# EAGLE board RedBot Accelerometer Panel v10 (EAGLE 6.4), part 1 of 4
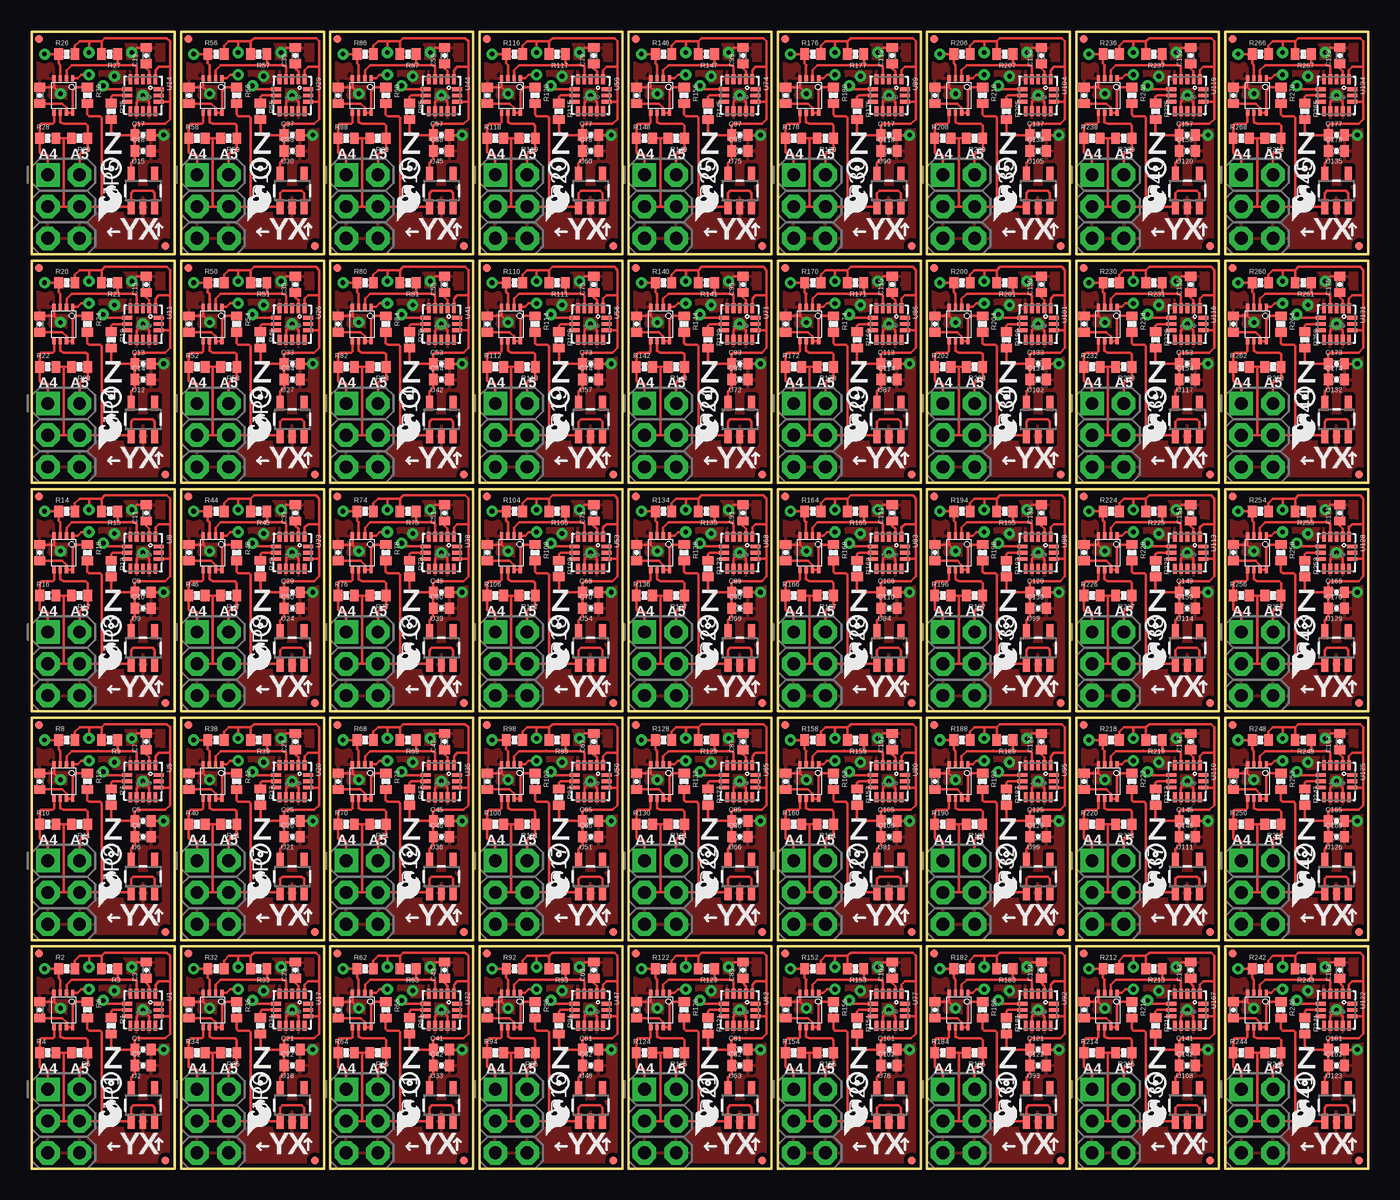
[diagram p0: board, top side]
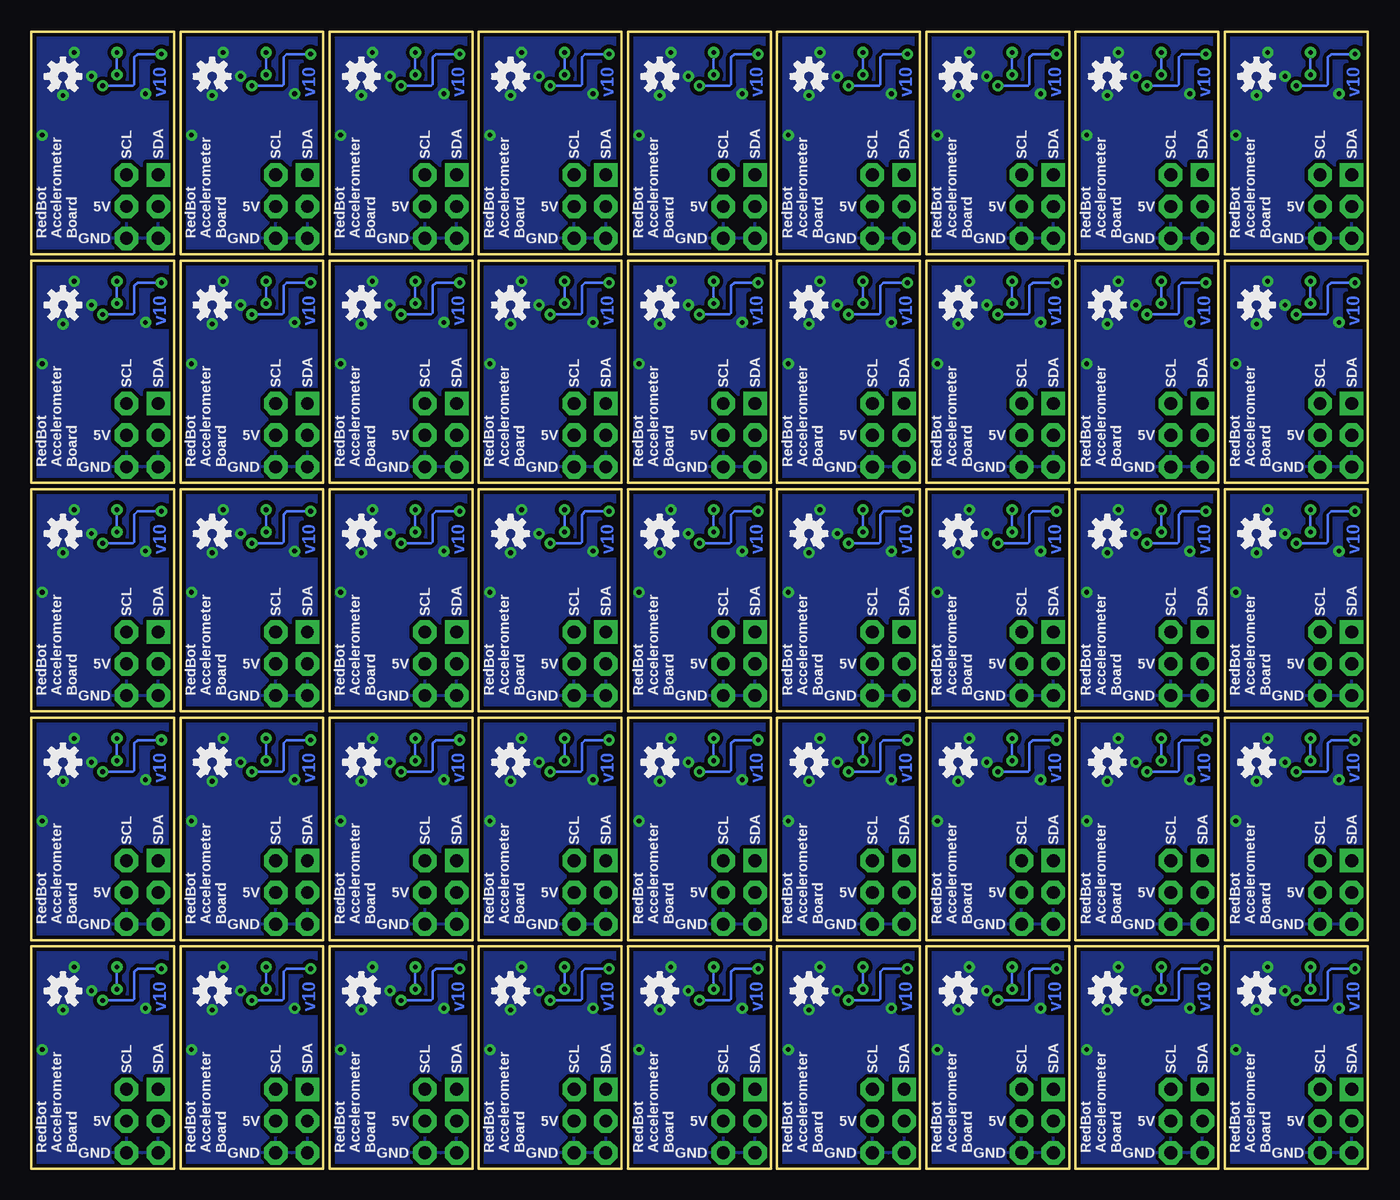
[diagram p1: board, bottom side, seen from below]

Size 106.93 x 90.93 mm. Coordinates in mm from the lower left corner, seen from the top.
Outline: 0,0 0,17.78 11.43,17.78 11.43,0 0,0
Outline: 0,18.29 0,36.07 11.43,36.07 11.43,18.29 0,18.29
Outline: 0,36.58 0,54.36 11.43,54.36 11.43,36.58 0,36.58
Outline: 0,54.86 0,72.64 11.43,72.64 11.43,54.86 0,54.86
Outline: 0,73.15 0,90.93 11.43,90.93 11.43,73.15 0,73.15
Outline: 11.94,0 11.94,17.78 23.37,17.78 23.37,0 11.94,0
Outline: 11.94,18.29 11.94,36.07 23.37,36.07 23.37,18.29 11.94,18.29
Outline: 11.94,36.58 11.94,54.36 23.37,54.36 23.37,36.58 11.94,36.58
Outline: 11.94,54.86 11.94,72.64 23.37,72.64 23.37,54.86 11.94,54.86
Outline: 11.94,73.15 11.94,90.93 23.37,90.93 23.37,73.15 11.94,73.15
Outline: 23.88,0 23.88,17.78 35.31,17.78 35.31,0 23.88,0
Outline: 23.88,18.29 23.88,36.07 35.31,36.07 35.31,18.29 23.88,18.29
Outline: 23.88,36.58 23.88,54.36 35.31,54.36 35.31,36.58 23.88,36.58
Outline: 23.88,54.86 23.88,72.64 35.31,72.64 35.31,54.86 23.88,54.86
Outline: 23.88,73.15 23.88,90.93 35.31,90.93 35.31,73.15 23.88,73.15
Outline: 35.81,0 35.81,17.78 47.24,17.78 47.24,0 35.81,0
Outline: 35.81,18.29 35.81,36.07 47.24,36.07 47.24,18.29 35.81,18.29
Outline: 35.81,36.58 35.81,54.36 47.24,54.36 47.24,36.58 35.81,36.58
Outline: 35.81,54.86 35.81,72.64 47.24,72.64 47.24,54.86 35.81,54.86
Outline: 35.81,73.15 35.81,90.93 47.24,90.93 47.24,73.15 35.81,73.15
Outline: 47.75,0 47.75,17.78 59.18,17.78 59.18,0 47.75,0
Outline: 47.75,18.29 47.75,36.07 59.18,36.07 59.18,18.29 47.75,18.29
Outline: 47.75,36.58 47.75,54.36 59.18,54.36 59.18,36.58 47.75,36.58
Outline: 47.75,54.86 47.75,72.64 59.18,72.64 59.18,54.86 47.75,54.86
Outline: 47.75,73.15 47.75,90.93 59.18,90.93 59.18,73.15 47.75,73.15
Outline: 59.69,0 59.69,17.78 71.12,17.78 71.12,0 59.69,0
Outline: 59.69,18.29 59.69,36.07 71.12,36.07 71.12,18.29 59.69,18.29
Outline: 59.69,36.58 59.69,54.36 71.12,54.36 71.12,36.58 59.69,36.58
Outline: 59.69,54.86 59.69,72.64 71.12,72.64 71.12,54.86 59.69,54.86
Outline: 59.69,73.15 59.69,90.93 71.12,90.93 71.12,73.15 59.69,73.15
Outline: 71.63,0 71.63,17.78 83.06,17.78 83.06,0 71.63,0
Outline: 71.63,18.29 71.63,36.07 83.06,36.07 83.06,18.29 71.63,18.29
Outline: 71.63,36.58 71.63,54.36 83.06,54.36 83.06,36.58 71.63,36.58
Outline: 71.63,54.86 71.63,72.64 83.06,72.64 83.06,54.86 71.63,54.86
Outline: 71.63,73.15 71.63,90.93 83.06,90.93 83.06,73.15 71.63,73.15
Outline: 83.57,0 83.57,17.78 95,17.78 95,0 83.57,0
Outline: 83.57,18.29 83.57,36.07 95,36.07 95,18.29 83.57,18.29
Outline: 83.57,36.58 83.57,54.36 95,54.36 95,36.58 83.57,36.58
Outline: 83.57,54.86 83.57,72.64 95,72.64 95,54.86 83.57,54.86
Outline: 83.57,73.15 83.57,90.93 95,90.93 95,73.15 83.57,73.15
Outline: 95.5,0 95.5,17.78 106.93,17.78 106.93,0 95.5,0
Outline: 95.5,18.29 95.5,36.07 106.93,36.07 106.93,18.29 95.5,18.29
Outline: 95.5,36.58 95.5,54.36 106.93,54.36 106.93,36.58 95.5,36.58
Outline: 95.5,54.86 95.5,72.64 106.93,72.64 106.93,54.86 95.5,54.86
Outline: 95.5,73.15 95.5,90.93 106.93,90.93 106.93,73.15 95.5,73.15
Copper layers (1*16): Top 0.035mm / dielectric 1.5mm / Bottom 0.035mm
Design rules "Sparkfun": minimum track width 8mil, minimum drill 20mil, track to track 8mil, track to pad 8mil, pad to pad 8mil, via to via 8mil, smd to smd 8mil, copper to edge 8mil, drill to drill 8mil, minimum pad ring 12mil, minimum via ring 10mil, stop-mask expansion 4mil, vias tented up to drill 20mil, thermal gap 10mil

## Footprints (pad centres in the part's own frame; a part is rotated, then mirrored left to right if it is on the bottom)
0402-CAP = smd 0.7 x 0.9: 1 -0.65,0; 2 0.65,0
MICRO-FIDUCIAL = smd 0.635 x 0.635: 1 0,0
2X3-NS = drill 1.016 pad 1.88 square: 1 -2.54,-1.27 | drill 1.016 pad 1.88 octagon: 2 -2.54,1.27; 3 0,-1.27; 4 0,1.27; 5 2.54,-1.27; 6 2.54,1.27
0402-RES = smd 0.7 x 0.9: 1 -0.65,0; 2 0.65,0
QFN-16_0.5MM = smd 0.8 x 0.3: 1 -1.275,1; 2 -1.275,0.5; 3 -1.275,0; 4 -1.275,-0.5; 5 -1.275,-1; 9 1.275,-1; 10 1.275,-0.5; 11 1.275,0; 12 1.275,0.5; 13 1.275,1 | smd 0.3 x 0.8: 6 -0.5,-1.275; 7 0,-1.275; 8 0.5,-1.275; 14 0.5,1.275; 15 0,1.275; 16 -0.5,1.275
SOT23-5 = smd 0.55 x 1.2: 1 -0.95,-1.3; 2 0,-1.3; 3 0.95,-1.3; 4 0.95,1.3; 5 -0.95,1.3
PSOP-8 = smd 0.25 x 0.5: 1 -0.73,-1.37; 2 -0.23,-1.37; 3 0.27,-1.37; 4 0.77,-1.37; 5 0.77,1.38; 6 0.27,1.38; 7 -0.23,1.38; 8 -0.73,1.38

## Placement (x,y rotation side)
C1  0.1uF  [0402-CAP]  8.89,9.53 0 top
C2  4.7uF  [0402-CAP]  8.89,8.26 0 top
C3  0.1uF  [0402-CAP]  9.14,15.88 90 top
C4  0.1uF  [0402-CAP]  0.64,12.7 90 top
C5  0.1uF  [0402-CAP]  8.89,27.81 0 top
C6  4.7uF  [0402-CAP]  8.89,26.54 0 top
C7  0.1uF  [0402-CAP]  9.14,34.16 90 top
C8  0.1uF  [0402-CAP]  0.64,30.99 90 top
C9  0.1uF  [0402-CAP]  8.89,46.1 0 top
C10  4.7uF  [0402-CAP]  8.89,44.83 0 top
C11  0.1uF  [0402-CAP]  9.14,52.45 90 top
C12  0.1uF  [0402-CAP]  0.64,49.28 90 top
C13  0.1uF  [0402-CAP]  8.89,64.39 0 top
C14  4.7uF  [0402-CAP]  8.89,63.12 0 top
C15  0.1uF  [0402-CAP]  9.14,70.74 90 top
C16  0.1uF  [0402-CAP]  0.64,67.56 90 top
C17  0.1uF  [0402-CAP]  8.89,82.68 0 top
C18  4.7uF  [0402-CAP]  8.89,81.41 0 top
C19  0.1uF  [0402-CAP]  9.14,89.03 90 top
C20  0.1uF  [0402-CAP]  0.64,85.85 90 top
C21  0.1uF  [0402-CAP]  20.83,9.53 0 top
C22  4.7uF  [0402-CAP]  20.83,8.26 0 top
C23  0.1uF  [0402-CAP]  21.08,15.88 90 top
C24  0.1uF  [0402-CAP]  12.57,12.7 90 top
C25  0.1uF  [0402-CAP]  20.83,27.81 0 top
C26  4.7uF  [0402-CAP]  20.83,26.54 0 top
C27  0.1uF  [0402-CAP]  21.08,34.16 90 top
C28  0.1uF  [0402-CAP]  12.57,30.99 90 top
C29  0.1uF  [0402-CAP]  20.83,46.1 0 top
C30  4.7uF  [0402-CAP]  20.83,44.83 0 top
C31  0.1uF  [0402-CAP]  21.08,52.45 90 top
C32  0.1uF  [0402-CAP]  12.57,49.28 90 top
C33  0.1uF  [0402-CAP]  20.83,64.39 0 top
C34  4.7uF  [0402-CAP]  20.83,63.12 0 top
C35  0.1uF  [0402-CAP]  21.08,70.74 90 top
C36  0.1uF  [0402-CAP]  12.57,67.56 90 top
C37  0.1uF  [0402-CAP]  20.83,82.68 0 top
C38  4.7uF  [0402-CAP]  20.83,81.41 0 top
C39  0.1uF  [0402-CAP]  21.08,89.03 90 top
C40  0.1uF  [0402-CAP]  12.57,85.85 90 top
C41  0.1uF  [0402-CAP]  32.77,9.53 0 top
C42  4.7uF  [0402-CAP]  32.77,8.26 0 top
C43  0.1uF  [0402-CAP]  33.02,15.88 90 top
C44  0.1uF  [0402-CAP]  24.51,12.7 90 top
C45  0.1uF  [0402-CAP]  32.77,27.81 0 top
C46  4.7uF  [0402-CAP]  32.77,26.54 0 top
C47  0.1uF  [0402-CAP]  33.02,34.16 90 top
C48  0.1uF  [0402-CAP]  24.51,30.99 90 top
C49  0.1uF  [0402-CAP]  32.77,46.1 0 top
C50  4.7uF  [0402-CAP]  32.77,44.83 0 top
C51  0.1uF  [0402-CAP]  33.02,52.45 90 top
C52  0.1uF  [0402-CAP]  24.51,49.28 90 top
C53  0.1uF  [0402-CAP]  32.77,64.39 0 top
C54  4.7uF  [0402-CAP]  32.77,63.12 0 top
C55  0.1uF  [0402-CAP]  33.02,70.74 90 top
C56  0.1uF  [0402-CAP]  24.51,67.56 90 top
C57  0.1uF  [0402-CAP]  32.77,82.68 0 top
C58  4.7uF  [0402-CAP]  32.77,81.41 0 top
C59  0.1uF  [0402-CAP]  33.02,89.03 90 top
C60  0.1uF  [0402-CAP]  24.51,85.85 90 top
C61  0.1uF  [0402-CAP]  44.7,9.53 0 top
C62  4.7uF  [0402-CAP]  44.7,8.26 0 top
C63  0.1uF  [0402-CAP]  44.96,15.88 90 top
C64  0.1uF  [0402-CAP]  36.45,12.7 90 top
C65  0.1uF  [0402-CAP]  44.7,27.81 0 top
C66  4.7uF  [0402-CAP]  44.7,26.54 0 top
C67  0.1uF  [0402-CAP]  44.96,34.16 90 top
C68  0.1uF  [0402-CAP]  36.45,30.99 90 top
C69  0.1uF  [0402-CAP]  44.7,46.1 0 top
C70  4.7uF  [0402-CAP]  44.7,44.83 0 top
C71  0.1uF  [0402-CAP]  44.96,52.45 90 top
C72  0.1uF  [0402-CAP]  36.45,49.28 90 top
C73  0.1uF  [0402-CAP]  44.7,64.39 0 top
C74  4.7uF  [0402-CAP]  44.7,63.12 0 top
C75  0.1uF  [0402-CAP]  44.96,70.74 90 top
C76  0.1uF  [0402-CAP]  36.45,67.56 90 top
C77  0.1uF  [0402-CAP]  44.7,82.68 0 top
C78  4.7uF  [0402-CAP]  44.7,81.41 0 top
C79  0.1uF  [0402-CAP]  44.96,89.03 90 top
C80  0.1uF  [0402-CAP]  36.45,85.85 90 top
C81  0.1uF  [0402-CAP]  56.64,9.53 0 top
C82  4.7uF  [0402-CAP]  56.64,8.26 0 top
C83  0.1uF  [0402-CAP]  56.9,15.88 90 top
C84  0.1uF  [0402-CAP]  48.39,12.7 90 top
C85  0.1uF  [0402-CAP]  56.64,27.81 0 top
C86  4.7uF  [0402-CAP]  56.64,26.54 0 top
C87  0.1uF  [0402-CAP]  56.9,34.16 90 top
C88  0.1uF  [0402-CAP]  48.39,30.99 90 top
C89  0.1uF  [0402-CAP]  56.64,46.1 0 top
C90  4.7uF  [0402-CAP]  56.64,44.83 0 top
C91  0.1uF  [0402-CAP]  56.9,52.45 90 top
C92  0.1uF  [0402-CAP]  48.39,49.28 90 top
C93  0.1uF  [0402-CAP]  56.64,64.39 0 top
C94  4.7uF  [0402-CAP]  56.64,63.12 0 top
C95  0.1uF  [0402-CAP]  56.9,70.74 90 top
C96  0.1uF  [0402-CAP]  48.39,67.56 90 top
C97  0.1uF  [0402-CAP]  56.64,82.68 0 top
C98  4.7uF  [0402-CAP]  56.64,81.41 0 top
C99  0.1uF  [0402-CAP]  56.9,89.03 90 top
C100  0.1uF  [0402-CAP]  48.39,85.85 90 top
C101  0.1uF  [0402-CAP]  68.58,9.53 0 top
C102  4.7uF  [0402-CAP]  68.58,8.26 0 top
C103  0.1uF  [0402-CAP]  68.83,15.88 90 top
C104  0.1uF  [0402-CAP]  60.33,12.7 90 top
C105  0.1uF  [0402-CAP]  68.58,27.81 0 top
C106  4.7uF  [0402-CAP]  68.58,26.54 0 top
C107  0.1uF  [0402-CAP]  68.83,34.16 90 top
C108  0.1uF  [0402-CAP]  60.33,30.99 90 top
C109  0.1uF  [0402-CAP]  68.58,46.1 0 top
C110  4.7uF  [0402-CAP]  68.58,44.83 0 top
C111  0.1uF  [0402-CAP]  68.83,52.45 90 top
C112  0.1uF  [0402-CAP]  60.33,49.28 90 top
C113  0.1uF  [0402-CAP]  68.58,64.39 0 top
C114  4.7uF  [0402-CAP]  68.58,63.12 0 top
C115  0.1uF  [0402-CAP]  68.83,70.74 90 top
C116  0.1uF  [0402-CAP]  60.33,67.56 90 top
C117  0.1uF  [0402-CAP]  68.58,82.68 0 top
C118  4.7uF  [0402-CAP]  68.58,81.41 0 top
C119  0.1uF  [0402-CAP]  68.83,89.03 90 top
C120  0.1uF  [0402-CAP]  60.33,85.85 90 top
C121  0.1uF  [0402-CAP]  80.52,9.53 0 top
C122  4.7uF  [0402-CAP]  80.52,8.26 0 top
C123  0.1uF  [0402-CAP]  80.77,15.88 90 top
C124  0.1uF  [0402-CAP]  72.26,12.7 90 top
C125  0.1uF  [0402-CAP]  80.52,27.81 0 top
C126  4.7uF  [0402-CAP]  80.52,26.54 0 top
C127  0.1uF  [0402-CAP]  80.77,34.16 90 top
C128  0.1uF  [0402-CAP]  72.26,30.99 90 top
C129  0.1uF  [0402-CAP]  80.52,46.1 0 top
C130  4.7uF  [0402-CAP]  80.52,44.83 0 top
C131  0.1uF  [0402-CAP]  80.77,52.45 90 top
C132  0.1uF  [0402-CAP]  72.26,49.28 90 top
C133  0.1uF  [0402-CAP]  80.52,64.39 0 top
C134  4.7uF  [0402-CAP]  80.52,63.12 0 top
C135  0.1uF  [0402-CAP]  80.77,70.74 90 top
C136  0.1uF  [0402-CAP]  72.26,67.56 90 top
C137  0.1uF  [0402-CAP]  80.52,82.68 0 top
C138  4.7uF  [0402-CAP]  80.52,81.41 0 top
C139  0.1uF  [0402-CAP]  80.77,89.03 90 top
C140  0.1uF  [0402-CAP]  72.26,85.85 90 top
C141  0.1uF  [0402-CAP]  92.46,9.53 0 top
C142  4.7uF  [0402-CAP]  92.46,8.26 0 top
C143  0.1uF  [0402-CAP]  92.71,15.88 90 top
C144  0.1uF  [0402-CAP]  84.2,12.7 90 top
C145  0.1uF  [0402-CAP]  92.46,27.81 0 top
C146  4.7uF  [0402-CAP]  92.46,26.54 0 top
C147  0.1uF  [0402-CAP]  92.71,34.16 90 top
C148  0.1uF  [0402-CAP]  84.2,30.99 90 top
C149  0.1uF  [0402-CAP]  92.46,46.1 0 top
C150  4.7uF  [0402-CAP]  92.46,44.83 0 top
C151  0.1uF  [0402-CAP]  92.71,52.45 90 top
C152  0.1uF  [0402-CAP]  84.2,49.28 90 top
C153  0.1uF  [0402-CAP]  92.46,64.39 0 top
C154  4.7uF  [0402-CAP]  92.46,63.12 0 top
C155  0.1uF  [0402-CAP]  92.71,70.74 90 top
C156  0.1uF  [0402-CAP]  84.2,67.56 90 top
C157  0.1uF  [0402-CAP]  92.46,82.68 0 top
C158  4.7uF  [0402-CAP]  92.46,81.41 0 top
C159  0.1uF  [0402-CAP]  92.71,89.03 90 top
C160  0.1uF  [0402-CAP]  84.2,85.85 90 top
C161  0.1uF  [0402-CAP]  104.39,9.53 0 top
C162  4.7uF  [0402-CAP]  104.39,8.26 0 top
C163  0.1uF  [0402-CAP]  104.65,15.88 90 top
C164  0.1uF  [0402-CAP]  96.14,12.7 90 top
C165  0.1uF  [0402-CAP]  104.39,27.81 0 top
C166  4.7uF  [0402-CAP]  104.39,26.54 0 top
C167  0.1uF  [0402-CAP]  104.65,34.16 90 top
C168  0.1uF  [0402-CAP]  96.14,30.99 90 top
C169  0.1uF  [0402-CAP]  104.39,46.1 0 top
C170  4.7uF  [0402-CAP]  104.39,44.83 0 top
C171  0.1uF  [0402-CAP]  104.65,52.45 90 top
C172  0.1uF  [0402-CAP]  96.14,49.28 90 top
C173  0.1uF  [0402-CAP]  104.39,64.39 0 top
C174  4.7uF  [0402-CAP]  104.39,63.12 0 top
C175  0.1uF  [0402-CAP]  104.65,70.74 90 top
C176  0.1uF  [0402-CAP]  96.14,67.56 90 top
C177  0.1uF  [0402-CAP]  104.39,82.68 0 top
C178  4.7uF  [0402-CAP]  104.39,81.41 0 top
C179  0.1uF  [0402-CAP]  104.65,89.03 90 top
C180  0.1uF  [0402-CAP]  96.14,85.85 90 top
FID1  FIDUCIALUFIDUCIAL  [MICRO-FIDUCIAL]  0.58,17.2 0 top
FID2  FIDUCIALUFIDUCIAL  [MICRO-FIDUCIAL]  10.69,0.66 0 top
FID3  FIDUCIALUFIDUCIAL  [MICRO-FIDUCIAL]  0.58,35.48 0 top
FID4  FIDUCIALUFIDUCIAL  [MICRO-FIDUCIAL]  10.69,18.95 0 top
FID5  FIDUCIALUFIDUCIAL  [MICRO-FIDUCIAL]  0.58,53.77 0 top
FID6  FIDUCIALUFIDUCIAL  [MICRO-FIDUCIAL]  10.69,37.24 0 top
FID7  FIDUCIALUFIDUCIAL  [MICRO-FIDUCIAL]  0.58,72.06 0 top
FID8  FIDUCIALUFIDUCIAL  [MICRO-FIDUCIAL]  10.69,55.52 0 top
FID9  FIDUCIALUFIDUCIAL  [MICRO-FIDUCIAL]  0.58,90.35 0 top
FID10  FIDUCIALUFIDUCIAL  [MICRO-FIDUCIAL]  10.69,73.81 0 top
FID11  FIDUCIALUFIDUCIAL  [MICRO-FIDUCIAL]  12.52,17.2 0 top
FID12  FIDUCIALUFIDUCIAL  [MICRO-FIDUCIAL]  22.63,0.66 0 top
FID13  FIDUCIALUFIDUCIAL  [MICRO-FIDUCIAL]  12.52,35.48 0 top
FID14  FIDUCIALUFIDUCIAL  [MICRO-FIDUCIAL]  22.63,18.95 0 top
FID15  FIDUCIALUFIDUCIAL  [MICRO-FIDUCIAL]  12.52,53.77 0 top
FID16  FIDUCIALUFIDUCIAL  [MICRO-FIDUCIAL]  22.63,37.24 0 top
FID17  FIDUCIALUFIDUCIAL  [MICRO-FIDUCIAL]  12.52,72.06 0 top
FID18  FIDUCIALUFIDUCIAL  [MICRO-FIDUCIAL]  22.63,55.52 0 top
FID19  FIDUCIALUFIDUCIAL  [MICRO-FIDUCIAL]  12.52,90.35 0 top
FID20  FIDUCIALUFIDUCIAL  [MICRO-FIDUCIAL]  22.63,73.81 0 top
FID21  FIDUCIALUFIDUCIAL  [MICRO-FIDUCIAL]  24.46,17.2 0 top
FID22  FIDUCIALUFIDUCIAL  [MICRO-FIDUCIAL]  34.57,0.66 0 top
FID23  FIDUCIALUFIDUCIAL  [MICRO-FIDUCIAL]  24.46,35.48 0 top
FID24  FIDUCIALUFIDUCIAL  [MICRO-FIDUCIAL]  34.57,18.95 0 top
FID25  FIDUCIALUFIDUCIAL  [MICRO-FIDUCIAL]  24.46,53.77 0 top
FID26  FIDUCIALUFIDUCIAL  [MICRO-FIDUCIAL]  34.57,37.24 0 top
FID27  FIDUCIALUFIDUCIAL  [MICRO-FIDUCIAL]  24.46,72.06 0 top
FID28  FIDUCIALUFIDUCIAL  [MICRO-FIDUCIAL]  34.57,55.52 0 top
FID29  FIDUCIALUFIDUCIAL  [MICRO-FIDUCIAL]  24.46,90.35 0 top
FID30  FIDUCIALUFIDUCIAL  [MICRO-FIDUCIAL]  34.57,73.81 0 top
FID31  FIDUCIALUFIDUCIAL  [MICRO-FIDUCIAL]  36.4,17.2 0 top
FID32  FIDUCIALUFIDUCIAL  [MICRO-FIDUCIAL]  46.51,0.66 0 top
FID33  FIDUCIALUFIDUCIAL  [MICRO-FIDUCIAL]  36.4,35.48 0 top
FID34  FIDUCIALUFIDUCIAL  [MICRO-FIDUCIAL]  46.51,18.95 0 top
FID35  FIDUCIALUFIDUCIAL  [MICRO-FIDUCIAL]  36.4,53.77 0 top
FID36  FIDUCIALUFIDUCIAL  [MICRO-FIDUCIAL]  46.51,37.24 0 top
FID37  FIDUCIALUFIDUCIAL  [MICRO-FIDUCIAL]  36.4,72.06 0 top
FID38  FIDUCIALUFIDUCIAL  [MICRO-FIDUCIAL]  46.51,55.52 0 top
FID39  FIDUCIALUFIDUCIAL  [MICRO-FIDUCIAL]  36.4,90.35 0 top
FID40  FIDUCIALUFIDUCIAL  [MICRO-FIDUCIAL]  46.51,73.81 0 top
FID41  FIDUCIALUFIDUCIAL  [MICRO-FIDUCIAL]  48.34,17.2 0 top
FID42  FIDUCIALUFIDUCIAL  [MICRO-FIDUCIAL]  58.45,0.66 0 top
FID43  FIDUCIALUFIDUCIAL  [MICRO-FIDUCIAL]  48.34,35.48 0 top
FID44  FIDUCIALUFIDUCIAL  [MICRO-FIDUCIAL]  58.45,18.95 0 top
FID45  FIDUCIALUFIDUCIAL  [MICRO-FIDUCIAL]  48.34,53.77 0 top
FID46  FIDUCIALUFIDUCIAL  [MICRO-FIDUCIAL]  58.45,37.24 0 top
FID47  FIDUCIALUFIDUCIAL  [MICRO-FIDUCIAL]  48.34,72.06 0 top
FID48  FIDUCIALUFIDUCIAL  [MICRO-FIDUCIAL]  58.45,55.52 0 top
FID49  FIDUCIALUFIDUCIAL  [MICRO-FIDUCIAL]  48.34,90.35 0 top
FID50  FIDUCIALUFIDUCIAL  [MICRO-FIDUCIAL]  58.45,73.81 0 top
FID51  FIDUCIALUFIDUCIAL  [MICRO-FIDUCIAL]  60.27,17.2 0 top
FID52  FIDUCIALUFIDUCIAL  [MICRO-FIDUCIAL]  70.38,0.66 0 top
FID53  FIDUCIALUFIDUCIAL  [MICRO-FIDUCIAL]  60.27,35.48 0 top
FID54  FIDUCIALUFIDUCIAL  [MICRO-FIDUCIAL]  70.38,18.95 0 top
FID55  FIDUCIALUFIDUCIAL  [MICRO-FIDUCIAL]  60.27,53.77 0 top
FID56  FIDUCIALUFIDUCIAL  [MICRO-FIDUCIAL]  70.38,37.24 0 top
FID57  FIDUCIALUFIDUCIAL  [MICRO-FIDUCIAL]  60.27,72.06 0 top
FID58  FIDUCIALUFIDUCIAL  [MICRO-FIDUCIAL]  70.38,55.52 0 top
FID59  FIDUCIALUFIDUCIAL  [MICRO-FIDUCIAL]  60.27,90.35 0 top
FID60  FIDUCIALUFIDUCIAL  [MICRO-FIDUCIAL]  70.38,73.81 0 top
FID61  FIDUCIALUFIDUCIAL  [MICRO-FIDUCIAL]  72.21,17.2 0 top
FID62  FIDUCIALUFIDUCIAL  [MICRO-FIDUCIAL]  82.32,0.66 0 top
FID63  FIDUCIALUFIDUCIAL  [MICRO-FIDUCIAL]  72.21,35.48 0 top
FID64  FIDUCIALUFIDUCIAL  [MICRO-FIDUCIAL]  82.32,18.95 0 top
FID65  FIDUCIALUFIDUCIAL  [MICRO-FIDUCIAL]  72.21,53.77 0 top
FID66  FIDUCIALUFIDUCIAL  [MICRO-FIDUCIAL]  82.32,37.24 0 top
FID67  FIDUCIALUFIDUCIAL  [MICRO-FIDUCIAL]  72.21,72.06 0 top
FID68  FIDUCIALUFIDUCIAL  [MICRO-FIDUCIAL]  82.32,55.52 0 top
FID69  FIDUCIALUFIDUCIAL  [MICRO-FIDUCIAL]  72.21,90.35 0 top
FID70  FIDUCIALUFIDUCIAL  [MICRO-FIDUCIAL]  82.32,73.81 0 top
FID71  FIDUCIALUFIDUCIAL  [MICRO-FIDUCIAL]  84.15,17.2 0 top
FID72  FIDUCIALUFIDUCIAL  [MICRO-FIDUCIAL]  94.26,0.66 0 top
FID73  FIDUCIALUFIDUCIAL  [MICRO-FIDUCIAL]  84.15,35.48 0 top
FID74  FIDUCIALUFIDUCIAL  [MICRO-FIDUCIAL]  94.26,18.95 0 top
FID75  FIDUCIALUFIDUCIAL  [MICRO-FIDUCIAL]  84.15,53.77 0 top
FID76  FIDUCIALUFIDUCIAL  [MICRO-FIDUCIAL]  94.26,37.24 0 top
FID77  FIDUCIALUFIDUCIAL  [MICRO-FIDUCIAL]  84.15,72.06 0 top
FID78  FIDUCIALUFIDUCIAL  [MICRO-FIDUCIAL]  94.26,55.52 0 top
FID79  FIDUCIALUFIDUCIAL  [MICRO-FIDUCIAL]  84.15,90.35 0 top
FID80  FIDUCIALUFIDUCIAL  [MICRO-FIDUCIAL]  94.26,73.81 0 top
FID81  FIDUCIALUFIDUCIAL  [MICRO-FIDUCIAL]  96.09,17.2 0 top
FID82  FIDUCIALUFIDUCIAL  [MICRO-FIDUCIAL]  106.2,0.66 0 top
FID83  FIDUCIALUFIDUCIAL  [MICRO-FIDUCIAL]  96.09,35.48 0 top
FID84  FIDUCIALUFIDUCIAL  [MICRO-FIDUCIAL]  106.2,18.95 0 top
FID85  FIDUCIALUFIDUCIAL  [MICRO-FIDUCIAL]  96.09,53.77 0 top
FID86  FIDUCIALUFIDUCIAL  [MICRO-FIDUCIAL]  106.2,37.24 0 top
FID87  FIDUCIALUFIDUCIAL  [MICRO-FIDUCIAL]  96.09,72.06 0 top
FID88  FIDUCIALUFIDUCIAL  [MICRO-FIDUCIAL]  106.2,55.52 0 top
FID89  FIDUCIALUFIDUCIAL  [MICRO-FIDUCIAL]  96.09,90.35 0 top
FID90  FIDUCIALUFIDUCIAL  [MICRO-FIDUCIAL]  106.2,73.81 0 top
JP1  [2X3-NS]  2.54,3.81 270 top
JP2  [2X3-NS]  2.54,22.1 270 top
JP3  [2X3-NS]  2.54,40.39 270 top
JP4  [2X3-NS]  2.54,58.67 270 top
JP5  [2X3-NS]  2.54,76.96 270 top
JP6  [2X3-NS]  14.48,3.81 270 top
JP7  [2X3-NS]  14.48,22.1 270 top
JP8  [2X3-NS]  14.48,40.39 270 top
JP9  [2X3-NS]  14.48,58.67 270 top
JP10  [2X3-NS]  14.48,76.96 270 top
JP11  [2X3-NS]  26.42,3.81 270 top
JP12  [2X3-NS]  26.42,22.1 270 top
JP13  [2X3-NS]  26.42,40.39 270 top
JP14  [2X3-NS]  26.42,58.67 270 top
JP15  [2X3-NS]  26.42,76.96 270 top
JP16  [2X3-NS]  38.35,3.81 270 top
JP17  [2X3-NS]  38.35,22.1 270 top
JP18  [2X3-NS]  38.35,40.39 270 top
JP19  [2X3-NS]  38.35,58.67 270 top
JP20  [2X3-NS]  38.35,76.96 270 top
JP21  [2X3-NS]  50.29,3.81 270 top
JP22  [2X3-NS]  50.29,22.1 270 top
JP23  [2X3-NS]  50.29,40.39 270 top
JP24  [2X3-NS]  50.29,58.67 270 top
JP25  [2X3-NS]  50.29,76.96 270 top
JP26  [2X3-NS]  62.23,3.81 270 top
JP27  [2X3-NS]  62.23,22.1 270 top
JP28  [2X3-NS]  62.23,40.39 270 top
JP29  [2X3-NS]  62.23,58.67 270 top
JP30  [2X3-NS]  62.23,76.96 270 top
JP31  [2X3-NS]  74.17,3.81 270 top
JP32  [2X3-NS]  74.17,22.1 270 top
JP33  [2X3-NS]  74.17,40.39 270 top
JP34  [2X3-NS]  74.17,58.67 270 top
JP35  [2X3-NS]  74.17,76.96 270 top
JP36  [2X3-NS]  86.11,3.81 270 top
JP37  [2X3-NS]  86.11,22.1 270 top
JP38  [2X3-NS]  86.11,40.39 270 top
JP39  [2X3-NS]  86.11,58.67 270 top
JP40  [2X3-NS]  86.11,76.96 270 top
JP41  [2X3-NS]  98.04,3.81 270 top
JP42  [2X3-NS]  98.04,22.1 270 top
JP43  [2X3-NS]  98.04,40.39 270 top
JP44  [2X3-NS]  98.04,58.67 270 top
JP45  [2X3-NS]  98.04,76.96 270 top
LOGO1  LOGO-SFESK  [SFE-LOGO-FLAME]  5.33,2.67 0 top
LOGO2  OSHW-LOGOS  [OSHW-LOGO-S]  8.89,14.22 0 bottom
LOGO3  LOGO-SFESK  [SFE-LOGO-FLAME]  5.33,20.95 0 top
LOGO4  OSHW-LOGOS  [OSHW-LOGO-S]  8.89,32.51 0 bottom
LOGO5  LOGO-SFESK  [SFE-LOGO-FLAME]  5.33,39.24 0 top
LOGO6  OSHW-LOGOS  [OSHW-LOGO-S]  8.89,50.8 0 bottom
LOGO7  LOGO-SFESK  [SFE-LOGO-FLAME]  5.33,57.53 0 top
LOGO8  OSHW-LOGOS  [OSHW-LOGO-S]  8.89,69.09 0 bottom
LOGO9  LOGO-SFESK  [SFE-LOGO-FLAME]  5.33,75.82 0 top
LOGO10  OSHW-LOGOS  [OSHW-LOGO-S]  8.89,87.38 0 bottom
LOGO11  LOGO-SFESK  [SFE-LOGO-FLAME]  17.27,2.67 0 top
LOGO12  OSHW-LOGOS  [OSHW-LOGO-S]  20.83,14.22 0 bottom
LOGO13  LOGO-SFESK  [SFE-LOGO-FLAME]  17.27,20.95 0 top
LOGO14  OSHW-LOGOS  [OSHW-LOGO-S]  20.83,32.51 0 bottom
LOGO15  LOGO-SFESK  [SFE-LOGO-FLAME]  17.27,39.24 0 top
LOGO16  OSHW-LOGOS  [OSHW-LOGO-S]  20.83,50.8 0 bottom
LOGO17  LOGO-SFESK  [SFE-LOGO-FLAME]  17.27,57.53 0 top
LOGO18  OSHW-LOGOS  [OSHW-LOGO-S]  20.83,69.09 0 bottom
LOGO19  LOGO-SFESK  [SFE-LOGO-FLAME]  17.27,75.82 0 top
LOGO20  OSHW-LOGOS  [OSHW-LOGO-S]  20.83,87.38 0 bottom
LOGO21  LOGO-SFESK  [SFE-LOGO-FLAME]  29.21,2.67 0 top
LOGO22  OSHW-LOGOS  [OSHW-LOGO-S]  32.77,14.22 0 bottom
LOGO23  LOGO-SFESK  [SFE-LOGO-FLAME]  29.21,20.95 0 top
LOGO24  OSHW-LOGOS  [OSHW-LOGO-S]  32.77,32.51 0 bottom
LOGO25  LOGO-SFESK  [SFE-LOGO-FLAME]  29.21,39.24 0 top
LOGO26  OSHW-LOGOS  [OSHW-LOGO-S]  32.77,50.8 0 bottom
LOGO27  LOGO-SFESK  [SFE-LOGO-FLAME]  29.21,57.53 0 top
LOGO28  OSHW-LOGOS  [OSHW-LOGO-S]  32.77,69.09 0 bottom
LOGO29  LOGO-SFESK  [SFE-LOGO-FLAME]  29.21,75.82 0 top
LOGO30  OSHW-LOGOS  [OSHW-LOGO-S]  32.77,87.38 0 bottom
LOGO31  LOGO-SFESK  [SFE-LOGO-FLAME]  41.15,2.67 0 top
LOGO32  OSHW-LOGOS  [OSHW-LOGO-S]  44.7,14.22 0 bottom
LOGO33  LOGO-SFESK  [SFE-LOGO-FLAME]  41.15,20.95 0 top
LOGO34  OSHW-LOGOS  [OSHW-LOGO-S]  44.7,32.51 0 bottom
LOGO35  LOGO-SFESK  [SFE-LOGO-FLAME]  41.15,39.24 0 top
LOGO36  OSHW-LOGOS  [OSHW-LOGO-S]  44.7,50.8 0 bottom
LOGO37  LOGO-SFESK  [SFE-LOGO-FLAME]  41.15,57.53 0 top
LOGO38  OSHW-LOGOS  [OSHW-LOGO-S]  44.7,69.09 0 bottom
LOGO39  LOGO-SFESK  [SFE-LOGO-FLAME]  41.15,75.82 0 top
LOGO40  OSHW-LOGOS  [OSHW-LOGO-S]  44.7,87.38 0 bottom
LOGO41  LOGO-SFESK  [SFE-LOGO-FLAME]  53.09,2.67 0 top
LOGO42  OSHW-LOGOS  [OSHW-LOGO-S]  56.64,14.22 0 bottom
LOGO43  LOGO-SFESK  [SFE-LOGO-FLAME]  53.09,20.95 0 top
LOGO44  OSHW-LOGOS  [OSHW-LOGO-S]  56.64,32.51 0 bottom
LOGO45  LOGO-SFESK  [SFE-LOGO-FLAME]  53.09,39.24 0 top
LOGO46  OSHW-LOGOS  [OSHW-LOGO-S]  56.64,50.8 0 bottom
LOGO47  LOGO-SFESK  [SFE-LOGO-FLAME]  53.09,57.53 0 top
LOGO48  OSHW-LOGOS  [OSHW-LOGO-S]  56.64,69.09 0 bottom
LOGO49  LOGO-SFESK  [SFE-LOGO-FLAME]  53.09,75.82 0 top
LOGO50  OSHW-LOGOS  [OSHW-LOGO-S]  56.64,87.38 0 bottom
LOGO51  LOGO-SFESK  [SFE-LOGO-FLAME]  65.02,2.67 0 top
LOGO52  OSHW-LOGOS  [OSHW-LOGO-S]  68.58,14.22 0 bottom
LOGO53  LOGO-SFESK  [SFE-LOGO-FLAME]  65.02,20.95 0 top
LOGO54  OSHW-LOGOS  [OSHW-LOGO-S]  68.58,32.51 0 bottom
LOGO55  LOGO-SFESK  [SFE-LOGO-FLAME]  65.02,39.24 0 top
LOGO56  OSHW-LOGOS  [OSHW-LOGO-S]  68.58,50.8 0 bottom
LOGO57  LOGO-SFESK  [SFE-LOGO-FLAME]  65.02,57.53 0 top
LOGO58  OSHW-LOGOS  [OSHW-LOGO-S]  68.58,69.09 0 bottom
LOGO59  LOGO-SFESK  [SFE-LOGO-FLAME]  65.02,75.82 0 top
LOGO60  OSHW-LOGOS  [OSHW-LOGO-S]  68.58,87.38 0 bottom
LOGO61  LOGO-SFESK  [SFE-LOGO-FLAME]  76.96,2.67 0 top
LOGO62  OSHW-LOGOS  [OSHW-LOGO-S]  80.52,14.22 0 bottom
LOGO63  LOGO-SFESK  [SFE-LOGO-FLAME]  76.96,20.95 0 top
LOGO64  OSHW-LOGOS  [OSHW-LOGO-S]  80.52,32.51 0 bottom
LOGO65  LOGO-SFESK  [SFE-LOGO-FLAME]  76.96,39.24 0 top
LOGO66  OSHW-LOGOS  [OSHW-LOGO-S]  80.52,50.8 0 bottom
LOGO67  LOGO-SFESK  [SFE-LOGO-FLAME]  76.96,57.53 0 top
LOGO68  OSHW-LOGOS  [OSHW-LOGO-S]  80.52,69.09 0 bottom
LOGO69  LOGO-SFESK  [SFE-LOGO-FLAME]  76.96,75.82 0 top
LOGO70  OSHW-LOGOS  [OSHW-LOGO-S]  80.52,87.38 0 bottom
LOGO71  LOGO-SFESK  [SFE-LOGO-FLAME]  88.9,2.67 0 top
LOGO72  OSHW-LOGOS  [OSHW-LOGO-S]  92.46,14.22 0 bottom
LOGO73  LOGO-SFESK  [SFE-LOGO-FLAME]  88.9,20.95 0 top
LOGO74  OSHW-LOGOS  [OSHW-LOGO-S]  92.46,32.51 0 bottom
LOGO75  LOGO-SFESK  [SFE-LOGO-FLAME]  88.9,39.24 0 top
LOGO76  OSHW-LOGOS  [OSHW-LOGO-S]  92.46,50.8 0 bottom
LOGO77  LOGO-SFESK  [SFE-LOGO-FLAME]  88.9,57.53 0 top
LOGO78  OSHW-LOGOS  [OSHW-LOGO-S]  92.46,69.09 0 bottom
LOGO79  LOGO-SFESK  [SFE-LOGO-FLAME]  88.9,75.82 0 top
LOGO80  OSHW-LOGOS  [OSHW-LOGO-S]  92.46,87.38 0 bottom
LOGO81  LOGO-SFESK  [SFE-LOGO-FLAME]  100.84,2.67 0 top
LOGO82  OSHW-LOGOS  [OSHW-LOGO-S]  104.39,14.22 0 bottom
LOGO83  LOGO-SFESK  [SFE-LOGO-FLAME]  100.84,20.95 0 top
LOGO84  OSHW-LOGOS  [OSHW-LOGO-S]  104.39,32.51 0 bottom
LOGO85  LOGO-SFESK  [SFE-LOGO-FLAME]  100.84,39.24 0 top
LOGO86  OSHW-LOGOS  [OSHW-LOGO-S]  104.39,50.8 0 bottom
LOGO87  LOGO-SFESK  [SFE-LOGO-FLAME]  100.84,57.53 0 top
LOGO88  OSHW-LOGOS  [OSHW-LOGO-S]  104.39,69.09 0 bottom
LOGO89  LOGO-SFESK  [SFE-LOGO-FLAME]  100.84,75.82 0 top
LOGO90  OSHW-LOGOS  [OSHW-LOGO-S]  104.39,87.38 0 bottom
R1  10k  [0402-RES]  6.35,11.43 270 top
R2  1k  [0402-RES]  2.79,16 0 top
R3  1k  [0402-RES]  6.22,16 180 top
R4  1k  [0402-RES]  1.27,9.27 0 top
R5  1k  [0402-RES]  3.81,9.27 180 top
R6  200k  [0402-RES]  4.45,12.7 270 top
R7  10k  [0402-RES]  6.35,29.72 270 top
R8  1k  [0402-RES]  2.79,34.29 0 top
R9  1k  [0402-RES]  6.22,34.29 180 top
R10  1k  [0402-RES]  1.27,27.56 0 top
R11  1k  [0402-RES]  3.81,27.56 180 top
R12  200k  [0402-RES]  4.45,30.99 270 top
R13  10k  [0402-RES]  6.35,48.01 270 top
R14  1k  [0402-RES]  2.79,52.58 0 top
R15  1k  [0402-RES]  6.22,52.58 180 top
R16  1k  [0402-RES]  1.27,45.85 0 top
R17  1k  [0402-RES]  3.81,45.85 180 top
R18  200k  [0402-RES]  4.45,49.28 270 top
R19  10k  [0402-RES]  6.35,66.29 270 top
R20  1k  [0402-RES]  2.79,70.87 0 top
R21  1k  [0402-RES]  6.22,70.87 180 top
R22  1k  [0402-RES]  1.27,64.14 0 top
R23  1k  [0402-RES]  3.81,64.14 180 top
R24  200k  [0402-RES]  4.45,67.56 270 top
R25  10k  [0402-RES]  6.35,84.58 270 top
R26  1k  [0402-RES]  2.79,89.15 0 top
R27  1k  [0402-RES]  6.22,89.15 180 top
R28  1k  [0402-RES]  1.27,82.42 0 top
R29  1k  [0402-RES]  3.81,82.42 180 top
R30  200k  [0402-RES]  4.45,85.85 270 top
R31  10k  [0402-RES]  18.29,11.43 270 top
R32  1k  [0402-RES]  14.73,16 0 top
R33  1k  [0402-RES]  18.16,16 180 top
R34  1k  [0402-RES]  13.21,9.27 0 top
R35  1k  [0402-RES]  15.75,9.27 180 top
R36  200k  [0402-RES]  16.38,12.7 270 top
R37  10k  [0402-RES]  18.29,29.72 270 top
R38  1k  [0402-RES]  14.73,34.29 0 top
R39  1k  [0402-RES]  18.16,34.29 180 top
R40  1k  [0402-RES]  13.21,27.56 0 top
R41  1k  [0402-RES]  15.75,27.56 180 top
R42  200k  [0402-RES]  16.38,30.99 270 top
R43  10k  [0402-RES]  18.29,48.01 270 top
R44  1k  [0402-RES]  14.73,52.58 0 top
R45  1k  [0402-RES]  18.16,52.58 180 top
R46  1k  [0402-RES]  13.21,45.85 0 top
R47  1k  [0402-RES]  15.75,45.85 180 top
R48  200k  [0402-RES]  16.38,49.28 270 top
R49  10k  [0402-RES]  18.29,66.29 270 top
R50  1k  [0402-RES]  14.73,70.87 0 top
R51  1k  [0402-RES]  18.16,70.87 180 top
R52  1k  [0402-RES]  13.21,64.14 0 top
R53  1k  [0402-RES]  15.75,64.14 180 top
R54  200k  [0402-RES]  16.38,67.56 270 top
R55  10k  [0402-RES]  18.29,84.58 270 top
R56  1k  [0402-RES]  14.73,89.15 0 top
R57  1k  [0402-RES]  18.16,89.15 180 top
R58  1k  [0402-RES]  13.21,82.42 0 top
R59  1k  [0402-RES]  15.75,82.42 180 top
R60  200k  [0402-RES]  16.38,85.85 270 top
R61  10k  [0402-RES]  30.23,11.43 270 top
R62  1k  [0402-RES]  26.67,16 0 top
R63  1k  [0402-RES]  30.1,16 180 top
R64  1k  [0402-RES]  25.15,9.27 0 top
R65  1k  [0402-RES]  27.69,9.27 180 top
R66  200k  [0402-RES]  28.32,12.7 270 top
R67  10k  [0402-RES]  30.23,29.72 270 top
R68  1k  [0402-RES]  26.67,34.29 0 top
R69  1k  [0402-RES]  30.1,34.29 180 top
R70  1k  [0402-RES]  25.15,27.56 0 top
R71  1k  [0402-RES]  27.69,27.56 180 top
R72  200k  [0402-RES]  28.32,30.99 270 top
R73  10k  [0402-RES]  30.23,48.01 270 top
R74  1k  [0402-RES]  26.67,52.58 0 top
R75  1k  [0402-RES]  30.1,52.58 180 top
R76  1k  [0402-RES]  25.15,45.85 0 top
R77  1k  [0402-RES]  27.69,45.85 180 top
R78  200k  [0402-RES]  28.32,49.28 270 top
R79  10k  [0402-RES]  30.23,66.29 270 top
R80  1k  [0402-RES]  26.67,70.87 0 top
R81  1k  [0402-RES]  30.1,70.87 180 top
R82  1k  [0402-RES]  25.15,64.14 0 top
R83  1k  [0402-RES]  27.69,64.14 180 top
R84  200k  [0402-RES]  28.32,67.56 270 top
R85  10k  [0402-RES]  30.23,84.58 270 top
R86  1k  [0402-RES]  26.67,89.15 0 top
R87  1k  [0402-RES]  30.1,89.15 180 top
R88  1k  [0402-RES]  25.15,82.42 0 top
R89  1k  [0402-RES]  27.69,82.42 180 top
R90  200k  [0402-RES]  28.32,85.85 270 top
R91  10k  [0402-RES]  42.16,11.43 270 top
R92  1k  [0402-RES]  38.61,16 0 top
R93  1k  [0402-RES]  42.04,16 180 top
R94  1k  [0402-RES]  37.08,9.27 0 top
R95  1k  [0402-RES]  39.62,9.27 180 top
R96  200k  [0402-RES]  40.26,12.7 270 top
R97  10k  [0402-RES]  42.16,29.72 270 top
R98  1k  [0402-RES]  38.61,34.29 0 top
R99  1k  [0402-RES]  42.04,34.29 180 top
R100  1k  [0402-RES]  37.08,27.56 0 top
R101  1k  [0402-RES]  39.62,27.56 180 top
R102  200k  [0402-RES]  40.26,30.99 270 top
R103  10k  [0402-RES]  42.16,48.01 270 top
R104  1k  [0402-RES]  38.61,52.58 0 top
R105  1k  [0402-RES]  42.04,52.58 180 top
R106  1k  [0402-RES]  37.08,45.85 0 top
R107  1k  [0402-RES]  39.62,45.85 180 top
R108  200k  [0402-RES]  40.26,49.28 270 top
R109  10k  [0402-RES]  42.16,66.29 270 top
R110  1k  [0402-RES]  38.61,70.87 0 top
R111  1k  [0402-RES]  42.04,70.87 180 top
R112  1k  [0402-RES]  37.08,64.14 0 top
R113  1k  [0402-RES]  39.62,64.14 180 top
R114  200k  [0402-RES]  40.26,67.56 270 top
R115  10k  [0402-RES]  42.16,84.58 270 top
R116  1k  [0402-RES]  38.61,89.15 0 top
R117  1k  [0402-RES]  42.04,89.15 180 top
R118  1k  [0402-RES]  37.08,82.42 0 top
R119  1k  [0402-RES]  39.62,82.42 180 top
R120  200k  [0402-RES]  40.26,85.85 270 top
R121  10k  [0402-RES]  54.1,11.43 270 top
R122  1k  [0402-RES]  50.55,16 0 top
R123  1k  [0402-RES]  53.98,16 180 top
R124  1k  [0402-RES]  49.02,9.27 0 top
R125  1k  [0402-RES]  51.56,9.27 180 top
R126  200k  [0402-RES]  52.2,12.7 270 top
R127  10k  [0402-RES]  54.1,29.72 270 top
R128  1k  [0402-RES]  50.55,34.29 0 top
R129  1k  [0402-RES]  53.98,34.29 180 top
R130  1k  [0402-RES]  49.02,27.56 0 top
R131  1k  [0402-RES]  51.56,27.56 180 top
R132  200k  [0402-RES]  52.2,30.99 270 top
R133  10k  [0402-RES]  54.1,48.01 270 top
R134  1k  [0402-RES]  50.55,52.58 0 top
R135  1k  [0402-RES]  53.98,52.58 180 top
R136  1k  [0402-RES]  49.02,45.85 0 top
R137  1k  [0402-RES]  51.56,45.85 180 top
R138  200k  [0402-RES]  52.2,49.28 270 top
R139  10k  [0402-RES]  54.1,66.29 270 top
R140  1k  [0402-RES]  50.55,70.87 0 top
R141  1k  [0402-RES]  53.98,70.87 180 top
R142  1k  [0402-RES]  49.02,64.14 0 top
R143  1k  [0402-RES]  51.56,64.14 180 top
R144  200k  [0402-RES]  52.2,67.56 270 top
R145  10k  [0402-RES]  54.1,84.58 270 top
R146  1k  [0402-RES]  50.55,89.15 0 top
R147  1k  [0402-RES]  53.98,89.15 180 top
R148  1k  [0402-RES]  49.02,82.42 0 top
R149  1k  [0402-RES]  51.56,82.42 180 top
R150  200k  [0402-RES]  52.2,85.85 270 top
R151  10k  [0402-RES]  66.04,11.43 270 top
R152  1k  [0402-RES]  62.48,16 0 top
R153  1k  [0402-RES]  65.91,16 180 top
R154  1k  [0402-RES]  60.96,9.27 0 top
R155  1k  [0402-RES]  63.5,9.27 180 top
R156  200k  [0402-RES]  64.14,12.7 270 top
R157  10k  [0402-RES]  66.04,29.72 270 top
R158  1k  [0402-RES]  62.48,34.29 0 top
R159  1k  [0402-RES]  65.91,34.29 180 top
R160  1k  [0402-RES]  60.96,27.56 0 top
R161  1k  [0402-RES]  63.5,27.56 180 top
R162  200k  [0402-RES]  64.14,30.99 270 top
R163  10k  [0402-RES]  66.04,48.01 270 top
R164  1k  [0402-RES]  62.48,52.58 0 top
R165  1k  [0402-RES]  65.91,52.58 180 top
R166  1k  [0402-RES]  60.96,45.85 0 top
R167  1k  [0402-RES]  63.5,45.85 180 top
R168  200k  [0402-RES]  64.14,49.28 270 top
R169  10k  [0402-RES]  66.04,66.29 270 top
R170  1k  [0402-RES]  62.48,70.87 0 top
R171  1k  [0402-RES]  65.91,70.87 180 top
R172  1k  [0402-RES]  60.96,64.14 0 top
R173  1k  [0402-RES]  63.5,64.14 180 top
R174  200k  [0402-RES]  64.14,67.56 270 top
R175  10k  [0402-RES]  66.04,84.58 270 top
R176  1k  [0402-RES]  62.48,89.15 0 top
R177  1k  [0402-RES]  65.91,89.15 180 top
R178  1k  [0402-RES]  60.96,82.42 0 top
R179  1k  [0402-RES]  63.5,82.42 180 top
R180  200k  [0402-RES]  64.14,85.85 270 top
R181  10k  [0402-RES]  77.98,11.43 270 top
R182  1k  [0402-RES]  74.42,16 0 top
R183  1k  [0402-RES]  77.85,16 180 top
R184  1k  [0402-RES]  72.9,9.27 0 top
R185  1k  [0402-RES]  75.44,9.27 180 top
R186  200k  [0402-RES]  76.07,12.7 270 top
R187  10k  [0402-RES]  77.98,29.72 270 top
R188  1k  [0402-RES]  74.42,34.29 0 top
R189  1k  [0402-RES]  77.85,34.29 180 top
R190  1k  [0402-RES]  72.9,27.56 0 top
R191  1k  [0402-RES]  75.44,27.56 180 top
R192  200k  [0402-RES]  76.07,30.99 270 top
R193  10k  [0402-RES]  77.98,48.01 270 top
R194  1k  [0402-RES]  74.42,52.58 0 top
R195  1k  [0402-RES]  77.85,52.58 180 top
R196  1k  [0402-RES]  72.9,45.85 0 top
R197  1k  [0402-RES]  75.44,45.85 180 top
R198  200k  [0402-RES]  76.07,49.28 270 top
R199  10k  [0402-RES]  77.98,66.29 270 top
R200  1k  [0402-RES]  74.42,70.87 0 top
R201  1k  [0402-RES]  77.85,70.87 180 top
R202  1k  [0402-RES]  72.9,64.14 0 top
R203  1k  [0402-RES]  75.44,64.14 180 top
R204  200k  [0402-RES]  76.07,67.56 270 top
R205  10k  [0402-RES]  77.98,84.58 270 top
R206  1k  [0402-RES]  74.42,89.15 0 top
R207  1k  [0402-RES]  77.85,89.15 180 top
R208  1k  [0402-RES]  72.9,82.42 0 top
R209  1k  [0402-RES]  75.44,82.42 180 top
R210  200k  [0402-RES]  76.07,85.85 270 top
R211  10k  [0402-RES]  89.92,11.43 270 top
R212  1k  [0402-RES]  86.36,16 0 top
R213  1k  [0402-RES]  89.79,16 180 top
R214  1k  [0402-RES]  84.84,9.27 0 top
R215  1k  [0402-RES]  87.38,9.27 180 top
R216  200k  [0402-RES]  88.01,12.7 270 top
R217  10k  [0402-RES]  89.92,29.72 270 top
R218  1k  [0402-RES]  86.36,34.29 0 top
R219  1k  [0402-RES]  89.79,34.29 180 top
R220  1k  [0402-RES]  84.84,27.56 0 top
R221  1k  [0402-RES]  87.38,27.56 180 top
R222  200k  [0402-RES]  88.01,30.99 270 top
R223  10k  [0402-RES]  89.92,48.01 270 top
R224  1k  [0402-RES]  86.36,52.58 0 top
R225  1k  [0402-RES]  89.79,52.58 180 top
R226  1k  [0402-RES]  84.84,45.85 0 top
R227  1k  [0402-RES]  87.38,45.85 180 top
R228  200k  [0402-RES]  88.01,49.28 270 top
R229  10k  [0402-RES]  89.92,66.29 270 top
R230  1k  [0402-RES]  86.36,70.87 0 top
R231  1k  [0402-RES]  89.79,70.87 180 top
R232  1k  [0402-RES]  84.84,64.14 0 top
R233  1k  [0402-RES]  87.38,64.14 180 top
R234  200k  [0402-RES]  88.01,67.56 270 top
R235  10k  [0402-RES]  89.92,84.58 270 top
R236  1k  [0402-RES]  86.36,89.15 0 top
R237  1k  [0402-RES]  89.79,89.15 180 top
R238  1k  [0402-RES]  84.84,82.42 0 top
R239  1k  [0402-RES]  87.38,82.42 180 top
R240  200k  [0402-RES]  88.01,85.85 270 top
R241  10k  [0402-RES]  101.85,11.43 270 top
R242  1k  [0402-RES]  98.3,16 0 top
R243  1k  [0402-RES]  101.73,16 180 top
R244  1k  [0402-RES]  96.77,9.27 0 top
R245  1k  [0402-RES]  99.31,9.27 180 top
R246  200k  [0402-RES]  99.95,12.7 270 top
R247  10k  [0402-RES]  101.85,29.72 270 top
R248  1k  [0402-RES]  98.3,34.29 0 top
R249  1k  [0402-RES]  101.73,34.29 180 top
R250  1k  [0402-RES]  96.77,27.56 0 top
R251  1k  [0402-RES]  99.31,27.56 180 top
R252  200k  [0402-RES]  99.95,30.99 270 top
R253  10k  [0402-RES]  101.85,48.01 270 top
R254  1k  [0402-RES]  98.3,52.58 0 top
R255  1k  [0402-RES]  101.73,52.58 180 top
R256  1k  [0402-RES]  96.77,45.85 0 top
R257  1k  [0402-RES]  99.31,45.85 180 top
R258  200k  [0402-RES]  99.95,49.28 270 top
R259  10k  [0402-RES]  101.85,66.29 270 top
R260  1k  [0402-RES]  98.3,70.87 0 top
R261  1k  [0402-RES]  101.73,70.87 180 top
R262  1k  [0402-RES]  96.77,64.14 0 top
R263  1k  [0402-RES]  99.31,64.14 180 top
R264  200k  [0402-RES]  99.95,67.56 270 top
R265  10k  [0402-RES]  101.85,84.58 270 top
R266  1k  [0402-RES]  98.3,89.15 0 top
R267  1k  [0402-RES]  101.73,89.15 180 top
R268  1k  [0402-RES]  96.77,82.42 0 top
R269  1k  [0402-RES]  99.31,82.42 180 top
R270  200k  [0402-RES]  99.95,85.85 270 top
U1  MMA8452Q  [QFN-16_0.5MM]  8.89,12.7 270 top
U2  MIC5205-3.3V  [SOT23-5]  8.89,5.08 0 top
U3  PCA9306  [PSOP-8]  2.54,12.7 180 top
U4  PCA9306  [PSOP-8]  2.54,30.99 180 top
U5  MMA8452Q  [QFN-16_0.5MM]  8.89,30.99 270 top
U6  MIC5205-3.3V  [SOT23-5]  8.89,23.37 0 top
U7  PCA9306  [PSOP-8]  2.54,49.28 180 top
U8  MMA8452Q  [QFN-16_0.5MM]  8.89,49.28 270 top
U9  MIC5205-3.3V  [SOT23-5]  8.89,41.66 0 top
U10  PCA9306  [PSOP-8]  2.54,67.56 180 top
U11  MMA8452Q  [QFN-16_0.5MM]  8.89,67.56 270 top
U12  MIC5205-3.3V  [SOT23-5]  8.89,59.94 0 top
U13  PCA9306  [PSOP-8]  2.54,85.85 180 top
U14  MMA8452Q  [QFN-16_0.5MM]  8.89,85.85 270 top
U15  MIC5205-3.3V  [SOT23-5]  8.89,78.23 0 top
U16  PCA9306  [PSOP-8]  14.48,12.7 180 top
U17  MMA8452Q  [QFN-16_0.5MM]  20.83,12.7 270 top
U18  MIC5205-3.3V  [SOT23-5]  20.83,5.08 0 top
U19  PCA9306  [PSOP-8]  14.48,30.99 180 top
U20  MMA8452Q  [QFN-16_0.5MM]  20.83,30.99 270 top
U21  MIC5205-3.3V  [SOT23-5]  20.83,23.37 0 top
U22  PCA9306  [PSOP-8]  14.48,49.28 180 top
U23  MMA8452Q  [QFN-16_0.5MM]  20.83,49.28 270 top
U24  MIC5205-3.3V  [SOT23-5]  20.83,41.66 0 top
U25  PCA9306  [PSOP-8]  14.48,67.56 180 top
U26  MMA8452Q  [QFN-16_0.5MM]  20.83,67.56 270 top
U27  MIC5205-3.3V  [SOT23-5]  20.83,59.94 0 top
U28  PCA9306  [PSOP-8]  14.48,85.85 180 top
U29  MMA8452Q  [QFN-16_0.5MM]  20.83,85.85 270 top
U30  MIC5205-3.3V  [SOT23-5]  20.83,78.23 0 top
U31  PCA9306  [PSOP-8]  26.42,12.7 180 top
U32  MMA8452Q  [QFN-16_0.5MM]  32.77,12.7 270 top
U33  MIC5205-3.3V  [SOT23-5]  32.77,5.08 0 top
U34  PCA9306  [PSOP-8]  26.42,30.99 180 top
U35  MMA8452Q  [QFN-16_0.5MM]  32.77,30.99 270 top
U36  MIC5205-3.3V  [SOT23-5]  32.77,23.37 0 top
U37  PCA9306  [PSOP-8]  26.42,49.28 180 top
U38  MMA8452Q  [QFN-16_0.5MM]  32.77,49.28 270 top
U39  MIC5205-3.3V  [SOT23-5]  32.77,41.66 0 top
U40  PCA9306  [PSOP-8]  26.42,67.56 180 top
U41  MMA8452Q  [QFN-16_0.5MM]  32.77,67.56 270 top
U42  MIC5205-3.3V  [SOT23-5]  32.77,59.94 0 top
U43  PCA9306  [PSOP-8]  26.42,85.85 180 top
U44  MMA8452Q  [QFN-16_0.5MM]  32.77,85.85 270 top
U45  MIC5205-3.3V  [SOT23-5]  32.77,78.23 0 top
U46  PCA9306  [PSOP-8]  38.35,12.7 180 top
U47  MMA8452Q  [QFN-16_0.5MM]  44.7,12.7 270 top
U48  MIC5205-3.3V  [SOT23-5]  44.7,5.08 0 top
U49  PCA9306  [PSOP-8]  38.35,30.99 180 top
U50  MMA8452Q  [QFN-16_0.5MM]  44.7,30.99 270 top
U51  MIC5205-3.3V  [SOT23-5]  44.7,23.37 0 top
U52  PCA9306  [PSOP-8]  38.35,49.28 180 top
U53  MMA8452Q  [QFN-16_0.5MM]  44.7,49.28 270 top
U54  MIC5205-3.3V  [SOT23-5]  44.7,41.66 0 top
U55  PCA9306  [PSOP-8]  38.35,67.56 180 top
U56  MMA8452Q  [QFN-16_0.5MM]  44.7,67.56 270 top
U57  MIC5205-3.3V  [SOT23-5]  44.7,59.94 0 top
U58  PCA9306  [PSOP-8]  38.35,85.85 180 top
U59  MMA8452Q  [QFN-16_0.5MM]  44.7,85.85 270 top
U60  MIC5205-3.3V  [SOT23-5]  44.7,78.23 0 top
U61  PCA9306  [PSOP-8]  50.29,12.7 180 top
U62  MMA8452Q  [QFN-16_0.5MM]  56.64,12.7 270 top
U63  MIC5205-3.3V  [SOT23-5]  56.64,5.08 0 top
U64  PCA9306  [PSOP-8]  50.29,30.99 180 top
U65  MMA8452Q  [QFN-16_0.5MM]  56.64,30.99 270 top
U66  MIC5205-3.3V  [SOT23-5]  56.64,23.37 0 top
U67  PCA9306  [PSOP-8]  50.29,49.28 180 top
U68  MMA8452Q  [QFN-16_0.5MM]  56.64,49.28 270 top
U69  MIC5205-3.3V  [SOT23-5]  56.64,41.66 0 top
U70  PCA9306  [PSOP-8]  50.29,67.56 180 top
U71  MMA8452Q  [QFN-16_0.5MM]  56.64,67.56 270 top
U72  MIC5205-3.3V  [SOT23-5]  56.64,59.94 0 top
U73  PCA9306  [PSOP-8]  50.29,85.85 180 top
U74  MMA8452Q  [QFN-16_0.5MM]  56.64,85.85 270 top
U75  MIC5205-3.3V  [SOT23-5]  56.64,78.23 0 top
U76  PCA9306  [PSOP-8]  62.23,12.7 180 top
U77  MMA8452Q  [QFN-16_0.5MM]  68.58,12.7 270 top
U78  MIC5205-3.3V  [SOT23-5]  68.58,5.08 0 top
U79  PCA9306  [PSOP-8]  62.23,30.99 180 top
U80  MMA8452Q  [QFN-16_0.5MM]  68.58,30.99 270 top
U81  MIC5205-3.3V  [SOT23-5]  68.58,23.37 0 top
U82  PCA9306  [PSOP-8]  62.23,49.28 180 top
U83  MMA8452Q  [QFN-16_0.5MM]  68.58,49.28 270 top
U84  MIC5205-3.3V  [SOT23-5]  68.58,41.66 0 top
U85  PCA9306  [PSOP-8]  62.23,67.56 180 top
U86  MMA8452Q  [QFN-16_0.5MM]  68.58,67.56 270 top
U87  MIC5205-3.3V  [SOT23-5]  68.58,59.94 0 top
U88  PCA9306  [PSOP-8]  62.23,85.85 180 top
U89  MMA8452Q  [QFN-16_0.5MM]  68.58,85.85 270 top
U90  MIC5205-3.3V  [SOT23-5]  68.58,78.23 0 top
U91  PCA9306  [PSOP-8]  74.17,12.7 180 top
U92  MMA8452Q  [QFN-16_0.5MM]  80.52,12.7 270 top
U93  MIC5205-3.3V  [SOT23-5]  80.52,5.08 0 top
U94  PCA9306  [PSOP-8]  74.17,30.99 180 top
U95  MMA8452Q  [QFN-16_0.5MM]  80.52,30.99 270 top
U96  MIC5205-3.3V  [SOT23-5]  80.52,23.37 0 top
U97  PCA9306  [PSOP-8]  74.17,49.28 180 top
U98  MMA8452Q  [QFN-16_0.5MM]  80.52,49.28 270 top
U99  MIC5205-3.3V  [SOT23-5]  80.52,41.66 0 top
U100  PCA9306  [PSOP-8]  74.17,67.56 180 top
U101  MMA8452Q  [QFN-16_0.5MM]  80.52,67.56 270 top
U102  MIC5205-3.3V  [SOT23-5]  80.52,59.94 0 top
U103  PCA9306  [PSOP-8]  74.17,85.85 180 top
U104  MMA8452Q  [QFN-16_0.5MM]  80.52,85.85 270 top
U105  MIC5205-3.3V  [SOT23-5]  80.52,78.23 0 top
U106  PCA9306  [PSOP-8]  86.11,12.7 180 top
U107  MMA8452Q  [QFN-16_0.5MM]  92.46,12.7 270 top
U108  MIC5205-3.3V  [SOT23-5]  92.46,5.08 0 top
U109  PCA9306  [PSOP-8]  86.11,30.99 180 top
U110  MMA8452Q  [QFN-16_0.5MM]  92.46,30.99 270 top
U111  MIC5205-3.3V  [SOT23-5]  92.46,23.37 0 top
U112  PCA9306  [PSOP-8]  86.11,49.28 180 top
U113  MMA8452Q  [QFN-16_0.5MM]  92.46,49.28 270 top
U114  MIC5205-3.3V  [SOT23-5]  92.46,41.66 0 top
U115  PCA9306  [PSOP-8]  86.11,67.56 180 top
U116  MMA8452Q  [QFN-16_0.5MM]  92.46,67.56 270 top
U117  MIC5205-3.3V  [SOT23-5]  92.46,59.94 0 top
U118  PCA9306  [PSOP-8]  86.11,85.85 180 top
U119  MMA8452Q  [QFN-16_0.5MM]  92.46,85.85 270 top
U120  MIC5205-3.3V  [SOT23-5]  92.46,78.23 0 top
U121  PCA9306  [PSOP-8]  98.04,12.7 180 top
U122  MMA8452Q  [QFN-16_0.5MM]  104.39,12.7 270 top
U123  MIC5205-3.3V  [SOT23-5]  104.39,5.08 0 top
U124  PCA9306  [PSOP-8]  98.04,30.99 180 top
U125  MMA8452Q  [QFN-16_0.5MM]  104.39,30.99 270 top
U126  MIC5205-3.3V  [SOT23-5]  104.39,23.37 0 top
U127  PCA9306  [PSOP-8]  98.04,49.28 180 top
U128  MMA8452Q  [QFN-16_0.5MM]  104.39,49.28 270 top
U129  MIC5205-3.3V  [SOT23-5]  104.39,41.66 0 top
U130  PCA9306  [PSOP-8]  98.04,67.56 180 top
U131  MMA8452Q  [QFN-16_0.5MM]  104.39,67.56 270 top
U132  MIC5205-3.3V  [SOT23-5]  104.39,59.94 0 top
U133  PCA9306  [PSOP-8]  98.04,85.85 180 top
U134  MMA8452Q  [QFN-16_0.5MM]  104.39,85.85 270 top
U135  MIC5205-3.3V  [SOT23-5]  104.39,78.23 0 top

## Library data of the parts
C1 C3-C5 C7-C9 C11-C13 C15-C17 C19-C21 C23-C25 C27-C29 C31-C33 C35-C37 C39-C41 C43-C45 C47-C49 C51-C53 C55-C57 C59-C61 C63-C65 C67-C69 C71-C73 C75-C77 C79-C81 C83-C85 C87-C89 C91-C93 C95-C97 C99-C101 C103-C105 C107-C109 C111-C113 C115-C117 C119-C121 C123-C125 C127-C129 C131-C133 C135-C137 C139-C141 C143-C145 C147-C149 C151-C153 C155-C157 C159-C161 C163-C165 C167-C169 C171-C173 C175-C177 C179 C180 = SparkFun-Capacitors; PROD_ID: CAP-00810
C2 C6 C10 C14 C18 C22 C26 C30 C34 C38 C42 C46 C50 C54 C58 C62 C66 C70 C74 C78 C82 C86 C90 C94 C98 C102 C106 C110 C114 C118 C122 C126 C130 C134 C138 C142 C146 C150 C154 C158 C162 C166 C170 C174 C178 = SparkFun-Capacitors; PROD_ID: CAP-08280
FID1-FID90 LOGO1-LOGO90 = SparkFun-Aesthetics
JP1-JP45 = SparkFun-Connectors
R1 R7 R13 R19 R25 R31 R37 R43 R49 R55 R61 R67 R73 R79 R85 R91 R97 R103 R109 R115 R121 R127 R133 R139 R145 R151 R157 R163 R169 R175 R181 R187 R193 R199 R205 R211 R217 R223 R229 R235 R241 R247 R253 R259 R265 = SparkFun-Resistors; PROD_ID: RES-00824
R2-R5 R8-R11 R14-R17 R20-R23 R26-R29 R32-R35 R38-R41 R44-R47 R50-R53 R56-R59 R62-R65 R68-R71 R74-R77 R80-R83 R86-R89 R92-R95 R98-R101 R104-R107 R110-R113 R116-R119 R122-R125 R128-R131 R134-R137 R140-R143 R146-R149 R152-R155 R158-R161 R164-R167 R170-R173 R176-R179 R182-R185 R188-R191 R194-R197 R200-R203 R206-R209 R212-R215 R218-R221 R224-R227 R230-R233 R236-R239 R242-R245 R248-R251 R254-R257 R260-R263 R266-R269 = SparkFun-Resistors; PROD_ID: RES-07856
R6 R12 R18 R24 R30 R36 R42 R48 R54 R60 R66 R72 R78 R84 R90 R96 R102 R108 R114 R120 R126 R132 R138 R144 R150 R156 R162 R168 R174 R180 R186 R192 R198 R204 R210 R216 R222 R228 R234 R240 R246 R252 R258 R264 R270 = SparkFun-Resistors; PROD_ID: RES-09385
U1 U5 U8 U11 U14 U17 U20 U23 U26 U29 U32 U35 U38 U41 U44 U47 U50 U53 U56 U59 U62 U65 U68 U71 U74 U77 U80 U83 U86 U89 U92 U95 U98 U101 U104 U107 U110 U113 U116 U119 U122 U125 U128 U131 U134 = SparkFun-Sensors; PROD_ID: IC-10769
U2 U6 U9 U12 U15 U18 U21 U24 U27 U30 U33 U36 U39 U42 U45 U48 U51 U54 U57 U60 U63 U66 U69 U72 U75 U78 U81 U84 U87 U90 U93 U96 U99 U102 U105 U108 U111 U114 U117 U120 U123 U126 U129 U132 U135 = SparkFun-PowerIC; PROD_ID: VREG-00822
U3 U4 U7 U10 U13 U16 U19 U22 U25 U28 U31 U34 U37 U40 U43 U46 U49 U52 U55 U58 U61 U64 U67 U70 U73 U76 U79 U82 U85 U88 U91 U94 U97 U100 U103 U106 U109 U112 U115 U118 U121 U124 U127 U130 U133 = SparkFun-DigitalIC; PROD_ID: IC-10023